# Altium PCB Motor.PcbDoc
Units mil, origin at the board's own origin, x right, y up, seen from the top; angles counter-clockwise.
Board outline 6000 x 4000 mil, 2 copper layers (Top Layer, Bottom Layer); 11 components, 10 nets, 42 pads, 0 vias.
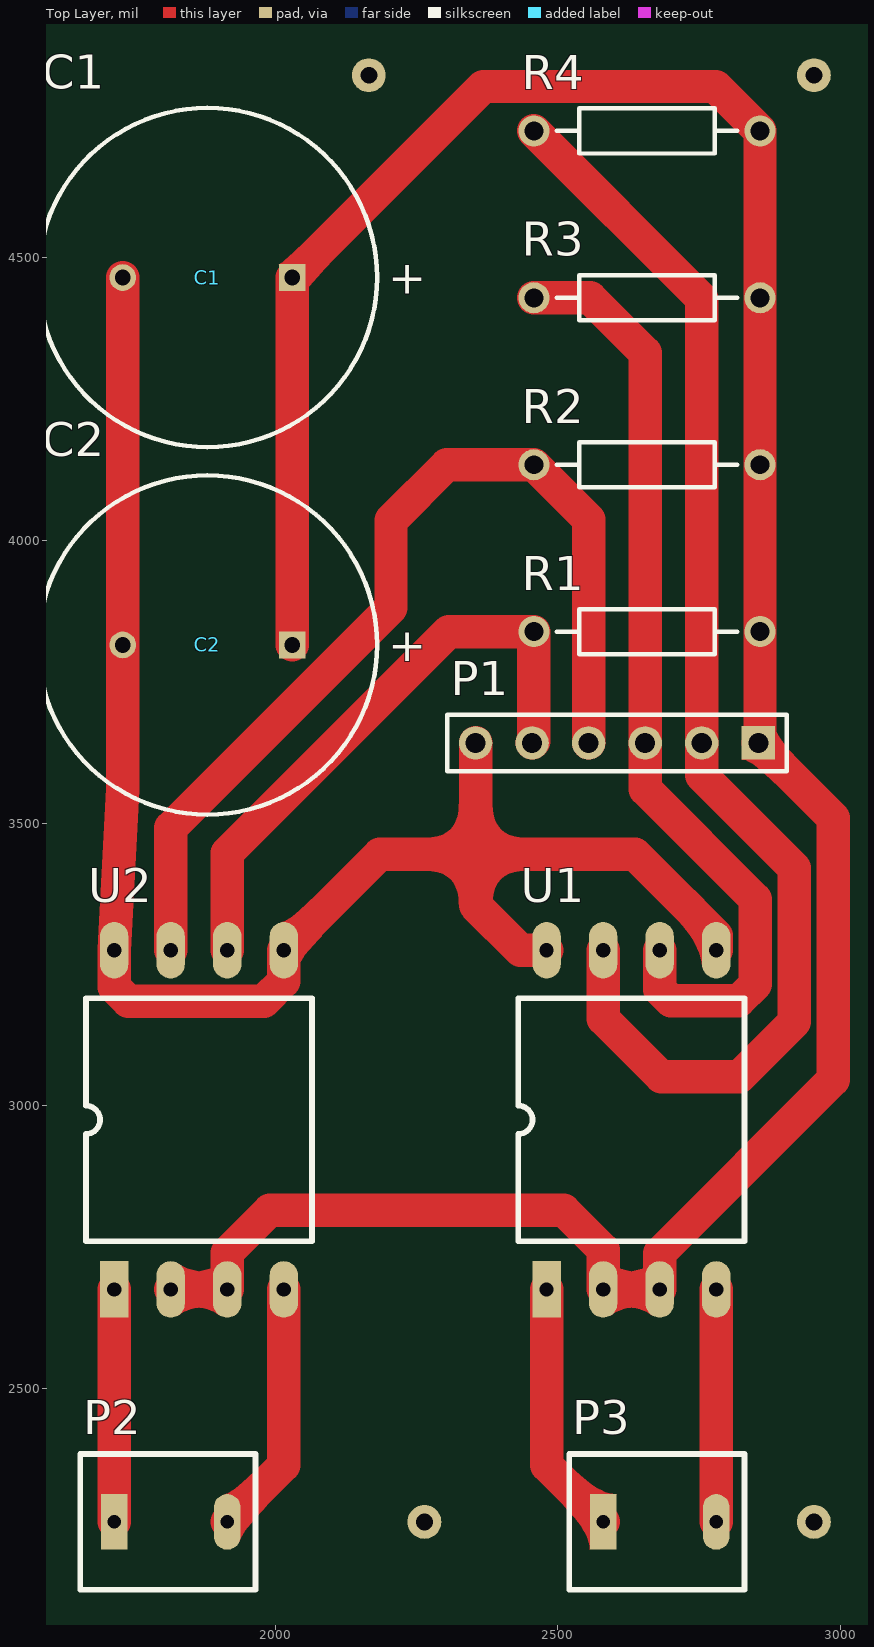
[diagram p0: Top Layer view]
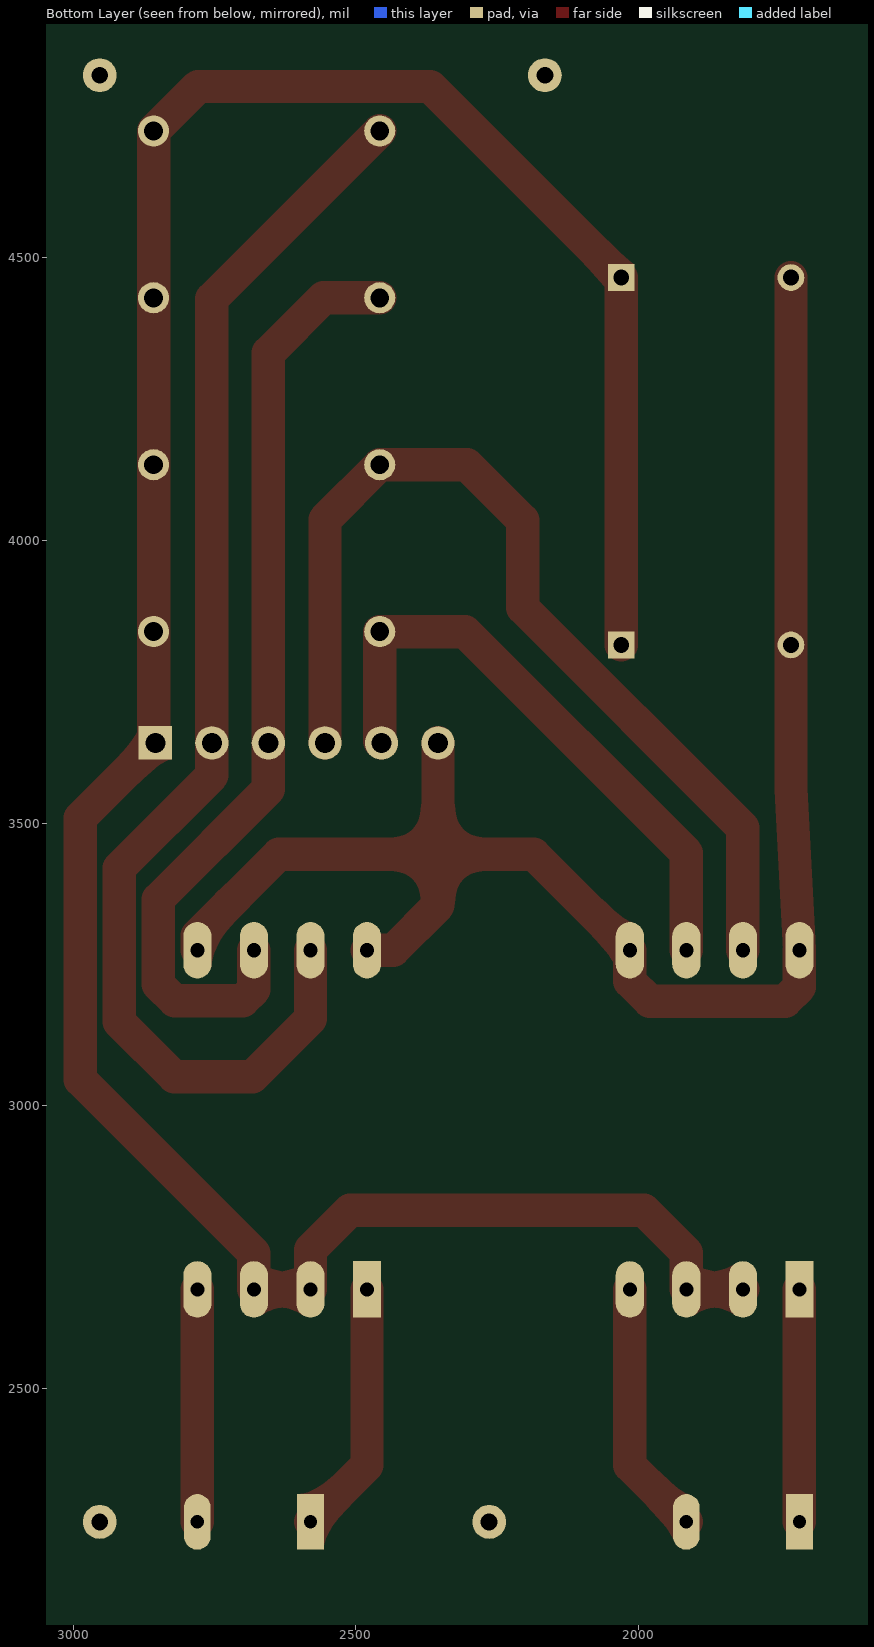
[diagram p1: Bottom Layer view, seen from below]

## Layer stack, top to bottom
Top Solder: solder mask 0.4, Solder Resist, Dk 3.5
Top Layer: signal copper 1.4
Dielectric 1: dielectric 12.6, FR-4, Dk 4.8
Bottom Layer: signal copper 1.4
Bottom Solder: solder mask 0.4, Solder Resist, Dk 3.5

## Board outline
1000,1000 7000,1000 7000,5000 1000,5000

## Design rules (kind name [scope] priority, off if disabled: settings)
Clearance [All] p1: gap=10
PolygonConnect [All] p1: connectstyle=Relief reliefconductorwidth=10 reliefentries=4 polygonreliefangle="90 Angle" airgapwidth=10
RoomDefinition Motor [InComponentClass('Motor')] p1: confinementstyle=ConfineIn formatcopy=TRUE lockcomponents=FALSE outline 7045,1060 8602.36,1060 8602.36,1880 7045,1880
RoutingLayers [All] p1: top layer_v5=TRUE bottom layer_v5=FALSE
RoutingVias [All] p1: holewidth=28 width=50 viastyle="Through Hole" minholewidth=28 minwidth=50 maxholewidth=28 maxwidth=50
SolderMaskExpansion [All] p1: expansion=4
Width [All] p1: maxlimit=59.06 minlimit=10 preferedwidth=59.06 toplayer_minwidth=59.06 bottomlayer_maxwidth=10 bottomlayer_prefwidth=10 minimp=50.000000 maximp=50.000000 favimp=50.000000
29 further rules are at their usual default settings.

## Components (designator, comment, footprint, x,y, rotation, side; value= is the part's Value field where it differs from the comment)
C1 "Cap Pol1" RB7.6-15 1880,4465 r0 top
C2 "Cap Pol1" RB7.6-15 1880,3815 r0 top
P1 "Header 6" HDR1X6 2854.33,3641.73 r180 top
P2 "KF301-2P" DIP2 1715,2263.78 r90 top
P3 "KF301-2P" DIP2 2580,2263.78 r90 top
R1 "Res2" AXIAL-0.4 2657.48,3838.58 r0 top
R2 "Res2" AXIAL-0.4 2657.48,4133.86 r0 top
R3 "Res2" AXIAL-0.4 2657.48,4429.13 r0 top
R4 "Res2" AXIAL-0.4 2657.48,4724.41 r0 top
U1 "L9110H" DIP8 2480,2675 r90 top
U2 "L9110H" DIP8 1715,2675 r90 top

## Footprints (in the part's own frame and the unit in brackets; to place one, negate y for a bottom-side part, rotate by r counter-clockwise, add the part's x,y. Pads: shape width x height; smd on the part's side, far side on the other; paste and mask are expansions set on the pad)
AXIAL-0.4 [mm] "Axial Device, Thru-Hole; 2 Leads; 0.4 in Pin Spacing"
  round 1.4 hole 0.85: 1(-5.08,0) 2(5.08,0)
  silkscreen extent -4.06,-1.02 4.06,1.02
DIP2 [mm]
  rect 2.5x1.2 hole 0.6: 1(0,0)
  oval 2.5x1.2 hole 0.6: 2(0,-5.08)
  silkscreen extent -3.05,-6.35 3.05,1.52
DIP8 [mil]
  rect 100x50 hole 25: 1(0,0)
  oval 100x50 hole 25: 2(0,-100) 3(0,-200) 4(0,-300) 5(600,-300) 6(600,-200) 7(600,-100) 8(600,0)
  silkscreen extent 85,-350 515,50
HDR1X6 [mm] "Connector; Header; 6 Position"
  rect 1.5x1.5 hole 0.9: 1(0,0)
  round 1.5 hole 0.9: 2(2.54,0) 3(5.08,0) 4(7.62,0) 5(10.16,0) 6(12.7,0)
  silkscreen extent -1.27,-1.27 13.97,1.27
RB7.6-15 [mm] "Polarized Capacitor (Radial); 2 Leads"
  rect 1.2x1.2 hole 0.7: 1(3.81,0)
  round 1.2 hole 0.7: 2(-3.81,0)
  silkscreen extent -7.62,-7.62 7.62,7.62

## Part data
C1 C2: "Polarized Capacitor (Radial)"
P1: "Header, 6-Pin"
R1 R2 R3 R4: "Resistor"

## Free pads (board coordinates)
  round 60 hole 30: 2(2952.76,2263.78) 3(2263.78,2263.78) 4(2165.35,4822.83) 5(2952.76,4822.83)

## Nets (pads, with @x,y where several pads share a name; then routed paths per layer and width w, separated by ;. In a path a pad name is that pad's centre, name@x,y a point inside that pad or via, vN(x,y) a via of type N, cw(c..) or ccw(c..) an arc to the next point about the centre after c; other vN are vias at no path point)
GND: C1.2 C2.2 P1.6 U1.5 U1.8 U2.5 U2.8 | length 3002.2
  Top Layer w59.06: C1.2 C2.2 1730,3560 U2.8 1715,3210 1740,3185 1980,3185 2015,3220 U2.5 2184.88,3444.88 2354.33,3444.88 ; P1.6 2354.33,3444.88 ; U1.8 2433.66,3275 2354.33,3354.33 2354.33,3444.88 ; U1.5 2780,3301.06 2636.18,3444.88 2354.33,3444.88
NetP1_2: P1.2 R4.1 U1.7 | length 2309.1
  Top Layer w59.06: R4.1 2754.33,4427.56 P1.2 2754.33,3584.25 2918.11,3420.47 2918.11,3148.24 2821.06,3051.18 2682.51,3051.18 2580,3153.7 U1.7
NetP1_3: P1.3 R3.1 U1.6 | length 1693.9
  Top Layer w59.06: R3.1 2556.87,4429.13 2654.33,4331.67 P1.3 2654.33,3560 2849.06,3365.27 2849.06,3214.53 2820,3185.47 2700,3185.47 2680,3205.47 U1.6
NetP1_4: P1.4 R2.1 U2.7 | length 1747.6
  Top Layer w59.06: U2.7 1815,3491.38 2204.62,3880.99 2204.62,4035.32 2303.15,4133.86 R2.1 2554.33,4037.01 P1.4
NetP1_5: P1.5 R1.1 U2.6 | length 1074.8
  Top Layer w59.06: U2.6 1915,3447 2306.58,3838.58 R1.1 2457.48,3644.88 P1.5
NetP2_1: P2.1 U2.1 | length 411.2
  Top Layer w59.06: P2.1 U2.1
NetP2_2: P2.2 U2.4 | length 452.6
  Top Layer w59.06: P2.2 2015,2363.78 U2.4
NetP3_1: P3.1 U1.1 | length 452.6
  Top Layer w59.06: U1.1 2480,2363.78 P3.1
NetP3_2: P3.2 U1.4 | length 411.2
  Top Layer w59.06: P3.2 U1.4
VSS: C1.1 C2.1 P1.1 R1.2 R2.2 R3.2 R4.2 U1.2 U1.3 U2.2 U2.3 | length 4943
  Top Layer w59.06: U2.2 U2.3 1915,2740 1989.96,2814.96 2510.04,2814.96 2580,2745 U1.2 U1.3 2680,2739.06 2987.17,3046.22 2987.17,3508.89 P1.1 2857.48,3644.88 R1.2 R2.2 R3.2 R4.2 2778.88,4803.01 2368.01,4803.01 C1.1 C2.1

## Silkscreen, mask and mechanical layers (free items; w line width, h text height)
Bottom Solder:
  lines w47.24: 1496.06,2047.24 1496.06,4921.26 3129.92,4921.26 3129.92,2047.24 1496.06,2047.24

## Text inside footprints (layer, text, board x,y; h text height)
C1: Top Overlay "+" at 2200.15,4435.99 h59.06
C2: Top Overlay "+" at 2200.15,3785.99 h59.06